# Altium PCB IoTracking_PCB.PcbDoc
Units mil, origin at the board's own origin, x right, y up, seen from the top; angles counter-clockwise.
Board outline 3149.61 x 3149.61 mil, 2 copper layers (Top Layer, Bottom Layer); 94 components, 53 nets, 307 pads, 11 vias.
Unrouted connection lines stored in the file: 210.
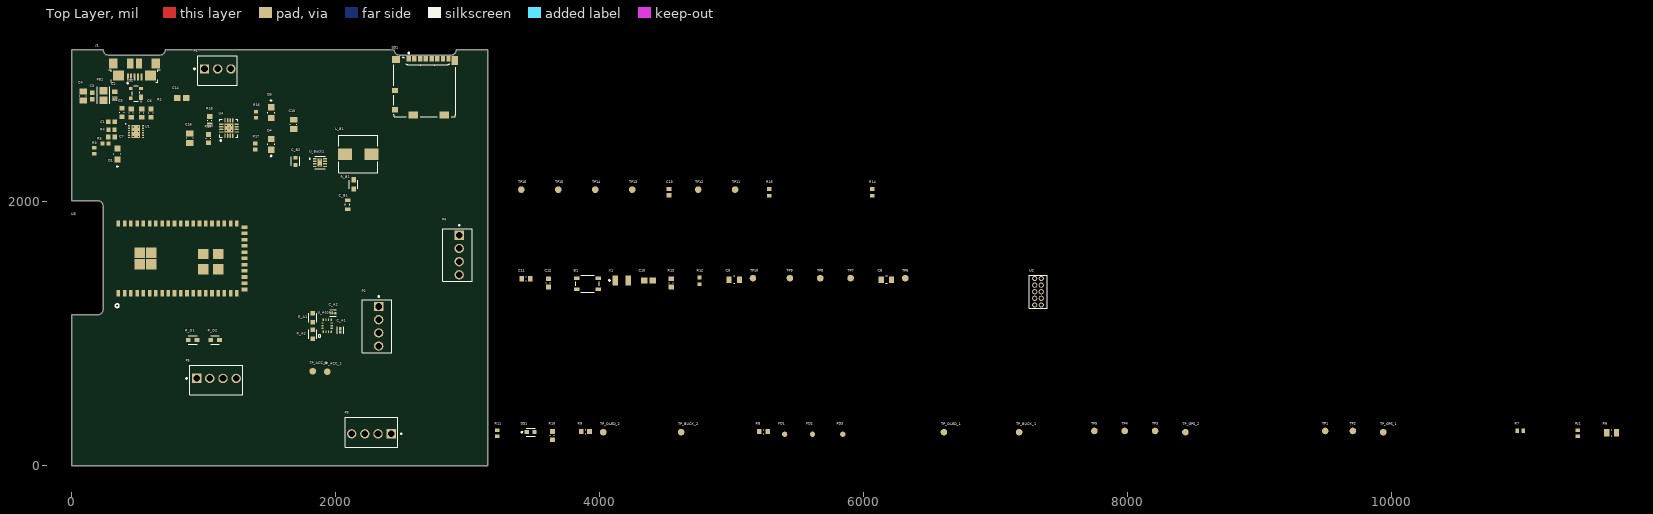
[diagram p0: Top Layer view]
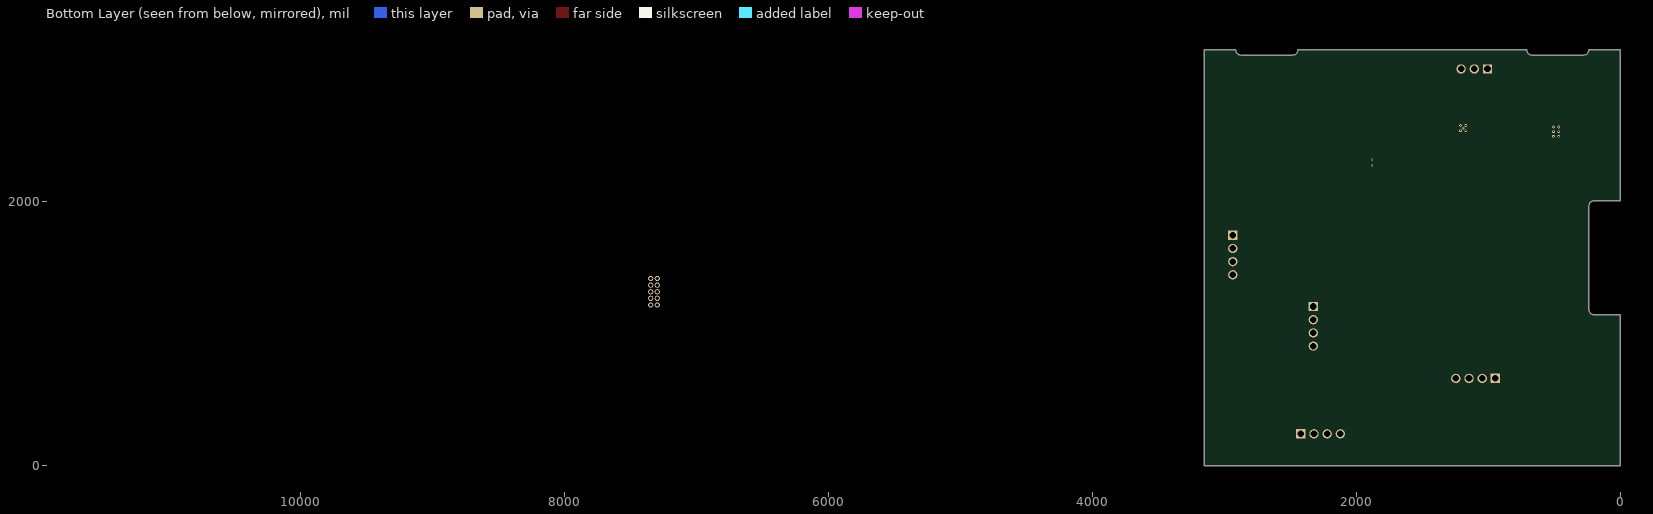
[diagram p1: Bottom Layer view, seen from below]

## Layer stack, top to bottom
Top Solder: solder mask 0.4, Solder Resist, Dk 3.5
Top Layer: signal copper 1.4
Dielectric 1: dielectric 12.6, FR-4, Dk 4.8
Bottom Layer: signal copper 1.4
Bottom Solder: solder mask 0.4, Solder Resist, Dk 3.5

## Board outline
2440.9,3149.56 708.61,3149.56 707.62,3140.8 704.71,3132.48 700.02,3125.01 693.79,3118.78 686.32,3114.09 678,3111.18 669.24,3110.19 275.54,3110.19 266.78,3111.18 258.46,3114.09 250.99,3118.78 244.76,3125.01 240.07,3132.48 237.16,3140.8 236.17,3149.56 -0.05,3149.56 -0.05,2007.83 196.8,2007.83 205.56,2006.84 213.88,2003.93 221.35,1999.24 227.58,1993 232.27,1985.54 235.18,1977.22 236.17,1968.46 236.17,1181.06 235.18,1172.29 232.27,1163.97 227.58,1156.51 221.35,1150.27 213.88,1145.58 205.56,1142.67 196.8,1141.69 -0.05,1141.69 -0.05,-0.05 3149.56,-0.05 3149.56,3149.56 2913.34,3149.56 2912.35,3140.8 2909.44,3132.48 2904.75,3125.01 2898.51,3118.78 2891.05,3114.09 2882.73,3111.18 2873.97,3110.19 2480.27,3110.19 2471.5,3111.18 2463.18,3114.09 2455.72,3118.78 2449.48,3125.01 2444.79,3132.48 2441.88,3140.8

## Design rules (kind name [scope] priority, off if disabled: settings)
Clearance [All] p1: gap=6 ignorepadtopadclearanceinfootprint=FALSE except(10: SMDPad-THPad)
DiffPairsRouting [All] p1: maxlimit=10 minlimit=10 mostfreqgap=10 toplayer_minwidth=15 toplayer_maxwidth=15 toplayer_prefwidth=15 bottomlayer_minwidth=15 bottomlayer_maxwidth=15 bottomlayer_prefwidth=15 maxuncoupledlength=500
PolygonConnect [All] p1: connectstyle=Relief reliefconductorwidth=10 reliefentries=4 polygonreliefangle="90 Angle" airgapwidth=10
RoutingVias [All] p1: holewidth=8 width=20 viastyle="Through Hole" minholewidth=8 minwidth=20 maxholewidth=30 maxwidth=50
SilkToSolderMaskClearance [IsPad] p1: minsilkscreentomaskgap=4 clearancetoexposedcopper=TRUE
SolderMaskExpansion [All] p1: expansion=4 istentingtop=FALSE
Width [All] p1: maxlimit=1000 minlimit=6 preferedwidth=10
28 further rules are at their usual default settings.

## Classes and differential pairs
component class U_Memory: C13 R14 R15 SD1 TP11 TP12 TP13 TP14 TP15 TP16
component class U_MCU: B1 C8 C9 C10 C11 C12 R12 R13 TP6 TP7 TP8 TP9 TP10 U2 U3 X1
component class U_LiPo_Charger: C14 C15 C16 D3 D4 R16 R17 R18 R19 U4
component class U_FTDI: C1 C2 C3 C4 C5 C6 C7 D1 D2 FB1 R1 R2 R3 R4 R5 U1
component class U_BuckConverter: C_B1 C_B2 L_B1 R_B1 U_Buck1
component class U_Accelerometer: C_A1 C_A2 U_Accel1
component class MAIN: DS1 FD1 FD2 FD3 J1 P1 P2 P3 P4 P5 R6 R7 R8 R9 R10 R11 R_A1 R_A2 R_O1 R_O2 RJ1 TP1 TP2 TP3 TP4 TP5 TP_ACC_1 TP_ACC_2 TP_BUCK_1 TP_BUCK_2 TP_GPS_1 TP_GPS_2 TP_OLED_1 TP_OLED_2
differential pair USB_FTDI_DATA: +USB_FTDI_DATA_P -USB_FTDI_DATA_N
differential pair USB_DATA: +USB_DATA_P -USB_DATA_N

## Components (designator, comment, footprint, x,y, rotation, side; value= is the part's Value field where it differs from the comment)
B1 "PTS810 SJK 250 SMTR LFS" "PTS810 SJK 250 SMTR LFS" 3906.75,1376.76 r0 top
C1 "100 nF 16V" CAPC1608X95X40LL15T15 299.95,2604.95 r180 top
C2 "10 nF 16V" CAPC1608X87X35NL15T15 324.95,2804.95 r90 top
C3 "100 nF 16V" CAPC1608X95X40LL15T15 154.95,2799.95 r270 top
C4 "4.7uF 16V" CAPC0805(2012)145_N 84.95,2799.95 r270 top value=4.7uF
C5 "47pF 16V" CAPC0603(1608)100_N 379.95,2674.95 r90 top value=47pF
C6 "47pF 16V" CAPC0603(1608)100_N 599.95,2669.95 r90 top value=47pF
C7 "100 nF 16V" CAPC1608X95X40LL15T15 299.95,2489.95 r0 top
C8 "10 uF 16V" FP-0805-L_2_01_0_2-W_1_25-MFG 6171.75,1408.76 r0 top
C9 "0805YD106KAT2A" FP-0805-L_2_01_0_2-W_1_25-MFG 5018.75,1408.76 r0 top
C10 "1 uF 16V" CAPC1608X90X35ML15T15 4368.75,1402.76 r0 top
C11 "18pF 16V" CAPC0603(1608)100_N 3440.75,1414.76 r0 top value=18pF
C12 "18pF 16V" CAPC0603(1608)100_N 3610.75,1384.76 r90 top value=18pF
C13 "0.1 uF 16V" CAPC1608X95X40LL15T15 4524.75,2071.76 r90 top
C14 "1 uF 16V" CAPC1608X90X35ML15T15 833.42,2784.95 r0 top
C15 "4.7uF 16V" CAPC0805(2012)145_N 1679.95,2584.52 r90 top value=4.7uF
C16 "4.7uF 16V" CAPC0805(2012)145_N 894.95,2480.39 r270 top value=4.7uF
C_A1 "100nF 6.3V" FP-GRM033-0_03-IPC_A 2034.95,1024.95 r270 top
C_A2 "100nF 6.3V" FP-GRM033-0_03-IPC_A 1979.95,1154.95 r0 top
C_B1 "22 uF 6.3 V" CAPC1608X100X20ML10 2089.95,1976.49 r90 top
C_B2 "10 uF 16V" FP-C1608-MFG 1694.95,2304.95 r270 top value=10uF
D1 "LTST-C170CKT" FP-LTST-C170CKT-MFG 344.95,2359.95 r270 top
D2 "PRTR5V0U2X,215" NXP-SOT143B-4_V 484.95,2819.95 r180 top
D3 "LTST-C170CKT" FP-LTST-C170CKT-MFG 1509.95,2673.61 r90 top
D4 "LTST-C170GKT" FP-LTST-C170GKT-MFG 1509.95,2433.61 r90 top
DS1 "Green LED" FP-LTST-C191KGKT-MFG 3476.75,252.76 r0 top
FB1 "BLM21PG221SN1D" FP-BLM21-0_2-t0_85-e0_5-IPC_A 239.95,2804.95 r270 top
FD1 "40x100mm" Fiducial_FT 5400.75,236.76 r0 top
FD2 "40x100mm" Fiducial_FT 5611.75,236.76 r0 top
FD3 "40x100mm" Fiducial_FT 5841.75,236.76 r0 top
J1 "ZX62R-B-5P" HIRO-ZX62R-B-5P_V 474.95,2994.95 r180 top
L_B1 "1 uH" WE-HCI-7040 2169.56,2359.95 r0 top
P1 "640456-3" TECO-640456-3 1104.95,3004.95 r180 top
P2 "Accelerometer Debug" TECO-640456-4 2324.95,1054.95 r90 top
P3 "GPS Header" TECO-640456-4 2269.95,239.95 r0 top
P4 "Extra Pins Header" TECO-640456-4 2934.95,1594.95 r90 top
P5 "OLED Header" TECO-640456-4 1094.95,659.95 r180 top
R1 "27R 1%" RESC0603(1608)_N 449.95,2669.95 r270 top value="27.00 Ohm"
R2 "27R 1%" RESC0603(1608)_N 529.95,2669.95 r270 top value="27.00 Ohm"
R3 "1K 1%" RESC1609X50X30LL10T20 169.95,2384.95 r90 top
R4 "Jumper" RESC1609X50X30LL10T20 299.95,2544.95 r0 top
R5 "1K 1%" RESC1609X50X30LL10T20 254.95,2439.95 r0 top
R6 "Jumper" RESC0805(2012)_N 11666.75,248.76 r0 top value="0.00 Ohm"
R7 "1KΩ 1%" RESC1609X50X30LL10T20 10973.75,262.76 r0 top
R8 "27R 1%" RESC0603(1608)_N 5240.75,256.76 r0 top value="27.00 Ohm"
R9 "27R 1%" RESC0603(1608)_N 3890.75,256.76 r0 top value="27.00 Ohm"
R10 "27R 1%" RESC0603(1608)_N 3640.75,226.76 r90 top value="27.00 Ohm"
R11 "1KΩ 1%" RESC1609X50X30LL10T20 3224.75,244.76 r90 top
R12 "10K 1%" RESC1609X55X30LL15T15 4755.75,1398.76 r90 top
R13 "100R 1%" RESC0603(1608)_N 4541.75,1384.76 r90 top value="100.00 Ohm"
R14 "10 K" RESC1609X55X30LL15T15 6063.75,2069.76 r90 top
R15 "10 K" RESC1609X55X30LL15T15 5284.75,2069.76 r90 top
R16 "1K 1%" RESC1609X50X30LL10T20 1394.95,2657.59 r270 top
R17 "1K 1%" RESC1609X50X30LL10T20 1389.95,2417.32 r270 top
R18 "1K13 1%" RESC0603(1608)_N 1044.95,2613.46 r90 top value="1130.00 Ohm"
R19 "1K13 1%" RESC0603(1608)_N 1034.95,2476.45 r90 top value="1130.00 Ohm"
R_A1 "4.7kΩ" FP-AT0603-MFG 1824.95,1119.95 r270 top value=4.7KΩ
R_A2 "4.7kΩ" FP-AT0603-MFG 1824.95,994.95 r90 top value=4.7KΩ
R_B1 "180 kΩ 0.1%" FP-CPF0603-MFG 2134.95,2129.95 r270 top value=180KΩ
R_O1 "4.7kΩ" FP-AT0603-MFG 914.95,949.95 r0 top value=4.7KΩ
R_O2 "4.7kΩ" FP-AT0603-MFG 1084.95,949.95 r180 top value=4.7KΩ
RJ1 "Jumper" RESC1609X50X30LL10T20 11411.75,244.76 r90 top
SD1 "104031-0811" MOLX-104031-0811_V 2674.95,2869.95 r180 top
TP1 "0.1\" Pad" PCBComponent 9496.75,261.76 r90 top
TP2 "0.1\" Pad" PCBComponent 9706.75,261.76 r90 top
TP3 "0.1\" Pad" PCBComponent 8207.75,261.76 r90 top
TP4 "0.1\" Pad" PCBComponent 7977.75,261.76 r90 top
TP5 "0.1\" Pad" PCBComponent 7747.75,261.76 r90 top
TP6 "0.1\" Pad" PCBComponent 6314.75,1419.76 r90 top
TP7 "0.1\" Pad" PCBComponent 5900.75,1419.76 r90 top
TP8 "0.1\" Pad" PCBComponent 5670.75,1419.76 r90 top
TP9 "0.1\" Pad" PCBComponent 5440.75,1419.76 r90 top
TP10 "0.1\" Pad" PCBComponent 5160.75,1419.76 r90 top
TP11 "0.1\" Pad" PCBComponent 5025.75,2090.76 r90 top
TP12 "0.1\" Pad" PCBComponent 4745.75,2090.76 r90 top
TP13 "0.1\" Pad" PCBComponent 4245.75,2090.76 r90 top
TP14 "0.1\" Pad" PCBComponent 3965.75,2090.76 r90 top
TP15 "0.1\" Pad" PCBComponent 3685.75,2090.76 r90 top
TP16 "0.1\" Pad" PCBComponent 3405.75,2090.76 r90 top
TP_ACC_1 "0.1\" Pad" PCBComponent 1934.95,709.95 r90 top
TP_ACC_2 "0.1\" Pad" PCBComponent 1824.95,714.95 r90 top
TP_BUCK_1 "0.1\" Pad" PCBComponent 7177.75,252.76 r90 top
TP_BUCK_2 "0.1\" Pad" PCBComponent 4616.75,252.76 r90 top
TP_GPS_1 "0.1\" Pad" PCBComponent 9936.75,252.76 r90 top
TP_GPS_2 "0.1\" Pad" PCBComponent 8437.75,252.76 r90 top
TP_OLED_1 "0.1\" Pad" PCBComponent 6607.75,252.76 r90 top
TP_OLED_2 "0.1\" Pad" PCBComponent 4026.75,252.76 r90 top
U1 "FT234XD-R" DFN-12_V 484.95,2529.95 r0 top
U2 "20021111-00010T4LF" 20021111-00010T4LF 7295.75,1316.76 r90 top
U3 "SAMW25H18-MR510PB" SAMW25H18-MR510PB 829.95,1569.95 r180 top
U4 "BQ24075RGTRG4" RGT16-1700X1700TP 1189.79,2556.88 r90 top
U_Accel1 "6 DoF Accelerometer" LSM6DSO 1934.95,1059.95 r90 top
U_Buck1 "TPS62082DSGR" SON50P200X200X80-9N 1878.73,2295.43 r0 top
X1 "ABS07-32.768KHz-T" ABRA-ABS07-2_V 4165.75,1402.76 r0 top

## Footprints (in the part's own frame and the unit in brackets; to place one, negate y for a bottom-side part, rotate by r counter-clockwise, add the part's x,y. Pads: shape width x height; smd on the part's side, far side on the other; paste and mask are expansions set on the pad)
20021111-00010T4LF [mil] "CONN HEADER 10POS UNSHD VERT T/H"
  round 39.6 hole 25.6: 1(-100,-50) 2(-100,0) 3(-50,-50) 4(-50,0) 5(0,-50) 6(0,0) 7(50,-50) 8(50,0) 9(100,-50) 10(100,0)
  silkscreen extent -125,-95 125,40, body extent -125,-92 125,42, height 217
ABRA-ABS07-2_V [mm] "Hand Drawn, 2-Leads, Body 3.2x1.5mm, Pitch 2.5mm"
  rect 1.1x1.9 smd: 1(-1.25,0) 2(1.25,0)
  silkscreen extent -2.47,-0.12 -2.22,0.12, body extent -1.6,-0.75 1.6,0.75, height 0.9
CAPC0603(1608)100_N [mm] "Chip Capacitor, Body 1.6x0.8mm, Height 1.0mm, IPC Medium Density"
  rect 0.9x1 smd: 1(-0.8,0) 2(0.8,0)
  silkscreen extent -0.05,-0.4 0.05,0.4, body extent -0.87,-0.48 0.88,0.47, height 1
CAPC0805(2012)145_N [mm] "Chip Capacitor, Body 2.0x1.2mm, Height 1.45mm, IPC Medium Density"
  rect 1.15x1.45 smd: 1(-0.9,0) 2(0.9,0)
  silkscreen extent -0.05,-0.62 0.05,0.63, body extent -1.1,-0.72 1.1,0.73, height 1.45
CAPC1608X87X35NL15T15 [mm] "Chip Capacitor, 2-Leads, Body 1.60x0.80mm, IPC Medium Density"
  rect 0.9x1 smd: 1(-0.675,0) 2(0.675,0)
  body extent -0.87,-0.48 0.87,0.47, height 0.87
CAPC1608X90X35ML15T15 [mm] "Chip Capacitor, 2-Leads, Body 1.60x0.81mm, IPC Low Density"
  rect 1.25x1.1 smd: 1(-0.85,0) 2(0.85,0)
  body extent -0.88,-0.48 0.87,0.48, height 0.9
CAPC1608X95X40LL15T15 [mm] "Chip Capacitor, 2-Leads, Body 1.60x0.80mm, IPC High Density"
  rect 0.85x0.9 smd: 1(-0.6,0) 2(0.6,0)
  body extent -0.87,-0.48 0.88,0.48, height 0.95
CAPC1608X100X20ML10 [mm] "Chip Capacitor, 2-Leads, Body 1.70x0.90mm, IPC Low Density"
  rect 0.65x1.05 smd: 1(-0.85,0) 2(0.85,0)
  silkscreen extent -0.15,-0.43 0.15,0.43, body extent -0.85,-0.45 0.85,0.45, height 1
DFN-12_V [mm] "SON, 12-Leads, Body 3x3mm, Pitch 0.45mm, Thermal Pad 2.5x1.6mm"
  rect 0.4x0.25 smd: 1(-1.35,1.125) 2(-1.35,0.675) 3(-1.35,0.225) 4(-1.35,-0.225) 5(-1.35,-0.675) 6(-1.35,-1.125) 7(1.35,-1.125) 8(1.35,-0.675) 9(1.35,-0.225) 10(1.35,0.225) 11(1.35,0.675) 12(1.35,1.125)
  rect 1.6x2.5 smd mask+0.102: 13(0,0)
  silkscreen extent -2,1.45 -1.9,1.55, body extent -1.5,-1.5 1.5,1.5, height 0.9
Fiducial_FT [mil]
  round 40 smd paste-30 mask+30: ""(0,0)
FP-0805-L_2_01_0_2-W_1_25-MFG [mm]
  rect 1x1.25 smd paste+0 mask+0: 1(-1,0) 2(1,0)
  silkscreen extent -0.13,-0.72 0.13,0.72, body extent -1.6,-0.82 1.6,0.82, height 0.25
FP-AT0603-MFG [mm]
  rect 0.9x0.8 smd paste+0 mask+0: 1(-0.85,0) 2(0.85,0)
  silkscreen extent -0.85,-0.8 0.85,0.8, body extent -1.4,-0.55 1.4,0.55, height 0.25
FP-BLM21-0_2-t0_85-e0_5-IPC_A [mil]
  rect 57.28x61.27 smd paste+0 mask+0: 1(-36.44,0) 2(36.44,0)
  silkscreen extent -65,-46 65,46, body extent -85,-50 85,50, height 10
FP-C1608-MFG [mm]
  rect 0.7x0.7 smd paste+0 mask+0: 1(-0.7,0) 2(0.7,0)
  silkscreen extent -0.86,-0.83 0.85,0.85, body extent -1.15,-0.55 1.15,0.55, height 0.25
FP-CPF0603-MFG [mm]
  rect 1x0.9 smd paste+0 mask+0: 1(-0.9,0) 2(0.9,0)
  silkscreen extent -0.82,-0.82 0.82,0.82, body extent -1.5,-0.55 1.5,0.55, height 0.25
FP-GRM033-0_03-IPC_A [mil]
  rect 21.82x18.22 smd paste+0 mask+0: 1(-13.95,0) 2(13.95,0)
  silkscreen extent -25,-25 25,25, body extent -33,-17 33,17, height 10
FP-LTST-C170CKT-MFG [mm]
  rect 1.2x1.2 smd paste+0 mask+0: 1(-1.05,0) 2(1.05,0)
  silkscreen extent -0.08,-0.67 2.63,0.67, body extent -1.75,-0.77 1.75,0.77, height 0.25
FP-LTST-C170GKT-MFG [mm]
  rect 1.2x1.2 smd paste+0 mask+0: 1(-1.05,0) 2(1.05,0)
  silkscreen extent -2.35,-0.67 0.08,0.67, body extent -1.75,-0.77 1.75,0.77, height 0.25
FP-LTST-C191KGKT-MFG [mm]
  rect 0.8x0.8 smd paste+0 mask+0: 1(-0.75,0) 2(0.75,0)
  silkscreen extent -1.82,-0.77 0.85,0.77, body extent -1.25,-0.55 1.25,0.55, height 0.25
HIRO-ZX62R-B-5P_V [mm] "USB Micro-B R/A Connector"
  rect 0.4x1.35 smd: 1(1.3,1.338) 2(0.65,1.338) 3(0,1.338) 4(-0.65,1.338) 5(-1.3,1.338)
  rect 2.1x2 smd: 6(-3.1,1.012) 11(3.1,1.012)
  rect 1.6x1.9 smd: 7(-4.1,-1.338) 10(4.1,-1.338)
  rect 1.2x1.9 smd: 8(-0.85,-1.338) 9(0.85,-1.338)
  silkscreen extent -4.95,-0.13 4.95,2.58, body extent -4.4,-3.95 4.4,1.78, height 2.71
LSM6DSO [mm] "Handmade footprint of LSM6DSO32TR"
  rect 0.475x0.25 smd: 1(-1.162,0.75) 2(-1.162,0.25) 3(-1.162,-0.25) 4(-1.162,-0.75) 8(1.162,-0.75) 9(1.162,-0.25) 10(1.162,0.25) 11(1.162,0.75)
  rect 0.25x0.475 smd: 5(-0.5,-0.913) 6(0,-0.913) 7(0.5,-0.913) 12(0.5,0.913) 13(0,0.913) 14(-0.5,0.913)
  silkscreen extent -2.25,1.25 -1.75,1.75, body extent -1.5,-1.25 1.5,1.25, height 1
MOLX-104031-0811_V [mm] "Micro SD, 8-Leads, Body 11.95x11.4mm, Pitch 1.1mm"
  rect 0.85x1.1 smd: 1(3.113,-5.412) 2(2.013,-5.412) 3(0.913,-5.412) 4(-0.188,-5.412) 5(-1.288,-5.412) 6(-2.387,-5.412) 7(-3.487,-5.412)
  rect 0.75x1.1 smd: 8(-4.537,-5.412)
  rect 1.2x1 smd: 9(5.748,0.738) 10(5.748,4.438)
  rect 1.55x1.35 smd: 11(5.573,-5.287)
  rect 1.17x1.8 smd: 12(-5.747,-5.062)
  rect 1.9x1.35 smd: 13(-3.722,5.413) 14(2.248,5.413)
  silkscreen extent -5.97,-6.64 5.98,5.74, body extent -5.97,-5.66 5.98,5.74, height 1.45
NXP-SOT143B-4_V [mm] "SOT143, 4-Leads, Body 3x1.4mm"
  rect 0.7x1 smd: 1(-1,0.75)
  rect 0.7x0.6 smd: 2(-1,-0.95) 3(1,-0.95) 4(1,0.95)
  silkscreen extent -1.05,-1.5 0.7,1.6, body extent -0.7,-1.5 0.7,1.5, height 1.1
PCBComponent [mil]
  round 50 smd mask+0: 1(0,0)
  body extent -25,-25 25,25, height 0
"PTS810 SJK 250 SMTR LFS" [mm] "SWITCH TACTILE SPST-NO 0.05A 16V"
  rect 1.05x0.65 smd: 1(-2.075,1.075) 2(2.075,1.075) 3(-2.075,-1.075) 4(2.075,-1.075)
  silkscreen extent -2.29,-1.65 2.29,1.65, body extent -2.3,-1.6 2.3,1.6, height 2.5
RESC0603(1608)_N [mm] "Chip Resistor, Body 1.6x0.8mm, IPC Medium Density"
  rect 0.9x1 smd: 1(-0.8,0) 2(0.8,0)
  silkscreen extent -0.05,-0.4 0.05,0.4, body extent -0.85,-0.47 0.85,0.47, height 0.6
RESC0805(2012)_N [mm] "Chip Resistor, Body 2.0x1.3mm, IPC Medium Density"
  rect 1.05x1.4 smd: 1(-0.95,0) 2(0.95,0)
  silkscreen extent -0.05,-0.6 0.05,0.6, body extent -1.1,-0.67 1.1,0.68, height 0.7
RESC1609X50X30LL10T20 [mm] "Chip Resistor, 2-Leads, Body 1.55x0.85mm, IPC High Density"
  rect 0.7x0.85 smd: 1(-0.575,0) 2(0.575,0)
  body extent -0.82,-0.48 0.82,0.48, height 0.5
RESC1609X55X30LL15T15 [mm] "Chip Resistor, 2-Leads, Body 1.75x0.95mm, IPC High Density"
  rect 0.75x0.85 smd: 1(-0.65,0) 2(0.65,0)
  body extent -0.87,-0.48 0.87,0.48, height 0.55
RGT16-1700X1700TP [mm] "QFN, 16-Leads, Body 3x3mm, Pitch 0.5mm, Thermal Pad 1.7x1.7mm, TI Recommended"
  oval 0.85x0.28 smd paste-0.025 mask+0.07: 1(-1.475,0.75) 2(-1.475,0.25) 3(-1.475,-0.25) 4(-1.475,-0.75) 9(1.475,-0.75) 10(1.475,-0.25) 11(1.475,0.25) 12(1.475,0.75)
  oval 0.28x0.85 smd paste-0.025 mask+0.07: 5(-0.75,-1.475) 6(-0.25,-1.475) 7(0.25,-1.475) 8(0.75,-1.475) 13(0.75,1.475) 14(0.25,1.475) 15(-0.25,1.475) 16(-0.75,1.475)
  rect 1.7x1.7 smd paste-0.85 mask+0.07: 17(0,0)
  silkscreen extent -2.5,-1.73 1.73,1.73, body extent -1.57,-1.57 1.58,1.58, height 1
SAMW25H18-MR510PB [mm] "RF TXRX MODULE WIFI TRACE ANT"
  rect 2x2 smd: 0(-7.065,-0.839) 0(-7.065,2.085) 0(-4.21,-0.839) 0(-4.21,2.085)
  rect 2x2 smd mask+0.12: 0(5.828,-1.045) 0(5.828,1.137) 0(8.046,-1.045) 0(8.046,1.137)
  rect 0.7x1.2 smd: 1(12.121,6.7) 2(10.921,6.7) 3(9.721,6.7) 4(8.521,6.7) 5(7.321,6.7) 6(6.121,6.7) 7(4.921,6.7) 8(3.721,6.7) 9(2.521,6.7) 10(1.321,6.7) 11(0.121,6.7) 12(-1.079,6.7) 13(-2.279,6.7) 14(-3.479,6.7) 15(-4.679,6.7) 16(-5.879,6.7) 17(-7.079,6.7) 18(-8.279,6.7) 19(-9.479,6.7) 20(-10.679,6.7) 32(-10.679,-6.7) 33(-9.479,-6.7) 34(-8.279,-6.7) 35(-7.079,-6.7) 36(-5.879,-6.7) 37(-4.679,-6.7) 38(-3.479,-6.7) 39(-2.279,-6.7) 40(-1.079,-6.7) 41(0.121,-6.7) 42(1.321,-6.7) 43(2.521,-6.7) 44(3.721,-6.7) 45(4.921,-6.7) 46(6.121,-6.7) 47(7.321,-6.7) 48(8.521,-6.7) 49(9.721,-6.7) 50(10.921,-6.7) 51(12.121,-6.7)
  rect 1.2x0.7 smd: 21(-12.12,6.004) 22(-12.12,4.804) 23(-12.12,3.604) 24(-12.12,2.404) 25(-12.12,1.204) 26(-12.12,0.004) 27(-12.12,-1.196) 28(-12.12,-2.396) 29(-12.12,-3.596) 30(-12.12,-4.796) 31(-12.12,-5.996)
  silkscreen extent 12.02,8.76 12.74,9.48, body extent -12.89,-7.45 20.98,7.46, height 3.37
SON50P200X200X80-9N [mm]
  rrect25% 0.74x0.28 smd: 1(-0.985,0.75) 2(-0.985,0.25) 3(-0.985,-0.25) 4(-0.985,-0.75) 5(0.985,-0.75) 6(0.985,-0.25) 7(0.985,0.25) 8(0.985,0.75)
  rect 0.9x1.6 smd paste-2: 9(0,0)
  round 0.4 hole 0.2 mask+0: 9_1(0,0.55) 9_2(0,-0.55)
  silkscreen extent -2.02,-1.21 1,1.21, body extent -1,-1 1,1, height 0.8
TECO-640456-3 [mm] "Through Hole, 3-Leads, Body 7.62x5.72mm, Pitch 2.54mm"
  rect 1.8x1.8 hole 1.27 paste+0: 1(2.54,0)
  round 1.8 hole 1.27 paste+0: 2(0,0) 3(-2.54,0)
  silkscreen extent -3.81,-2.54 4.59,3.18, body extent -3.81,-2.54 3.81,3.18, height 10.03
TECO-640456-4 [mm] "Through Hole, 4-Leads, Body 10.16x5.72mm, Pitch 2.54mm"
  rect 1.8x1.8 hole 1.27 paste+0: 1(3.81,0)
  round 1.8 hole 1.27 paste+0: 2(1.27,0) 3(-1.27,0) 4(-3.81,0)
  silkscreen extent -5.08,-2.54 5.86,3.18, body extent -5.08,-2.54 5.08,3.18, height 10.03
WE-HCI-7040 [mm] "SMD Inductor, 2-Leads, Body 7.0 x 6.9 mm"
  rect 2.7x2.2 smd: 1(-2.55,0) 2(2.55,0)
  silkscreen extent -3.75,-3.6 3.75,3.6, body extent -3.5,-3.45 3.5,3.45, height 4

## Part data
B1: "SWITCH TACTILE SPST-NO 0.05A 16V Tactile Switch SPST-NO Top Actuated Surface Mount", Color=White, Current Rating="50 mA", Manufacturer="ITT /  C&K Components", Manufacturer Part Number=PTS810SJK250SMTRLFS, Operating Force="2.6 N", Operating Temperature Range="- 40 C to + 85 C", Supplier Part Number 1=CKN10503CT-ND, Voltage Rating DC="16 VDC", Actuator=Oval, Brand="C&K Components", ComponentLink1Description=https://datasheet.ciiva.com/18514/pts810-4mar13-18514061.pdf, ComponentLink1URL=https://datasheet.ciiva.com/18514/pts810-4mar13-18514061.pdf, ComponentLink2Description=https://datasheet.ciiva.com/18514/pts810-4mar13-18514062.pdf, ComponentLink2URL=https://datasheet.ciiva.com/18514/pts810-4mar13-18514062.pdf, ComponentLink3Description=https://datasheet.ciiva.com/18514/pts810-4mar13-18514063.pdf, ComponentLink3URL=https://datasheet.ciiva.com/18514/pts810-4mar13-18514063.pdf, Contact Form=SPST, Contact Plating=Silver, Factory Pack Quantity=2900, Mounting Direction=Straight, Mounting Style=SMD/SMT, Packaging=Reel, Part # Aliases=Y97LT25B5DBFP, Product Category="Tactile Switches", RoHS=Details, Series=PTS810, Stem Height="2.5 mm", Supplier 1=Digi-Key, Switch Function="OFF - (ON)", Termination Style="J Form Lead", Travel="0.15 mm"
C1 C3 C7 C13: library part CMP-1035-02584-2, "VJ0603Y104KXJCW1BC", Manufacturer=Vitramon, Part Number=VJ0603Y104KXJCW1BC
C2: library part CMP-1035-02311-2, "C0603C103K4RACTU", Manufacturer=Kemet, Part Number=C0603C103K4RACTU
C4 C15 C16: library part CMP-1036-04893-1, "CAP 4.7uF 16V -20% to +80% 0805 (2012 Metric) Thickness 1.45mm SMD", Case-EIA=0805, Case-Metric=2012, Rated Voltage="16 V", Tolerance="-20% to +80%", Max Thickness="1.45 mm", Technology=SMT
C5 C6: library part CMP-1035-01048-1, "CAP 47pF 16V ±0.5pF 0603 (1608 Metric) Thickness 1mm SMD", Case-EIA=0603, Case-Metric=1608, Rated Voltage="16 V", Tolerance=?±0.5pF, Max Thickness="1 mm", Technology=SMT
C8 C9: library part CMP-1036-04927-3, "General Purpose Ceramic Capacitor, 0805, 10uF, 10%, X5R, 15%, 16V", Capacitance=10uF, Case Code (Imperial)=0805, Case Code (Metric)=2012, Dielectric=X5R, Dielectric Material=Ceramic, Max Operating Temperature=85°C, Min Operating Temperature=-55°C, Package Quantity=1, Tolerance=10%, Voltage=16V, Case/Package=0805, Construction=Flat, Contact Plating=Tin, Depth=1.25mm, Height=1.4mm, Lead Free="Lead Free", Length=2.01mm, Mount="Surface Mount", Number of Pins=2, Packaging="Tape and Reel", Radiation Hardening=No, REACH SVHC="No SVHC", RoHS Compliant=Yes, Series=-, Termination=SMD/SMT, Thickness=0.055inch, Voltage Rating=16V, Voltage Rating (DC)=16V, Width=0.049inch
C10 C14: library part CMP-1035-02736-2, "0603YC105JAT2A", Manufacturer="AVX Interconnect / Elco", Part Number=0603YC105JAT2A
C11 C12: library part CMP-1035-00738-1, "CAP 18pF 16V ±5% 0603 (1608 Metric) Thickness 1mm SMD", Case-EIA=0603, Case-Metric=1608, Rated Voltage="16 V", Tolerance=?±5%, Max Thickness="1 mm", Technology=SMT
C_A1 C_A2: library part CMP-06035-061037-1, "Chip Multilayer Ceramic Capacitors for General Purpose, 0201, 0.10uF, X6S, 22%, 20%, 6.3V", Capacitance=100nF, Case Code (Imperial)=0201, Case Code (Metric)=0603, Dielectric=X6S, Max Operating Temperature=105°C, Min Operating Temperature=-55°C, Package Quantity=15000, Tolerance=20%, Voltage Rating=6.3V, Case/Package=0201, Height=0.3mm, Length=0.024inch, Mount="Surface Mount", Packaging="Tape and Reel", Termination=SMD/SMT, Thickness=0.013inch, Voltage Rating (DC)=6.3V, Weight=1.2E-05oz, Width=0.012inch
C_B1: library part CMP-2000-05440-1, "Chip Capacitor, 22 uF, +/- 20%, 6.3 V, -55 to 85 degC, 1608 (0603 Metric), RoHS, Tape and Reel", Capacitance=22μF, Manufacturer=TDK, Operating Temperature=-55degC~85degC, Package / Case=0603(1608Metric), Package Description="2-Pin Surface Mount Device, Body 1.6 x 0.8 mm", Package Reference=603, PCN Part Number=MLCCPartNumberChange30/Nov/2012, Ratings=-, Standard Package=1, Temperature Coefficient=X5R, Tolerance=±20%, Voltage - Rated=6.3V, Applications=GeneralPurpose, Category=Capacitors, Datasheet URL=http://www.farnell.com/datasheets/1913358.pdf, Datasheet Version=Mar-15, Design Resources=20WNon-IsolatedBuckLEDDriverUsingPLLNK460KG, Family=CeramicCapacitors, Features=-, Height - Seated (Max)=-, Kits=445-9003-KIT-ND-KITCAPCERHICAPMLCCSMD, Lead Spacing=-, Lead Style=-, Manufacturer URL=http://www.tdk.com/, Mounting Type=SurfaceMount,MLCC, Online Catalog=CSeries,GeneralPurpose, Other Names=445-8028-1, Packaging=CutTape(CT), Product Training Modules=CSeriesGeneralApplicationsSEAT,CCV,andTVCLDesignToolsGuidetoReplacinganElectrolyticCapacitorwithanMLCC, RoHS Information=RoHSCertificate-MLCC, Series=C, Size / Dimension="0.063\"Lx0.031\"W(1.60mmx0.80mm)", Thickness (Max)="0.039\"(1.00mm)"
C_B2: library part CMP-08246-000019-1, "CAP CER 10UF 16V X5R 0603", Capacitance=10uF, Manufacturer="TDK Corporation", Manufacturer Part Number=C1608X5R1C106M080AB, Package=C1608, Temperature="-55°C to +85°C", Temperature Characteristic=X5R, Temperature Coefficient=15%, Temperature Range High=+85°C, Temperature Range Low=-55°C, Tolerance=20%, Voltage Rating=16V, Automotive=No, Category=Cap, ComponentLink2Description=Datasheet, ComponentLink2URL=https://upverter.com/datasheet/6fbac97fd59b4a24a005814037d2a36a27db40e9.pdf, Device Class L1="Passive Components", Device Class L2=Capacitors, Device Class L3="Ceramic Capacitors", Digikey Description="CAP CER 10UF 16V X5R 0603", Height=0.9mm, Ipc Land Pattern Name=CAPC16080X80, Lead Free=Yes, Material=Ceramic, Mouser Description="Multilayer Ceramic Capacitors MLCC - SMD/SMT 0603 10uF 16volts X5R +/-20% GP", Octopart=https://octopart.com/c1608x5r1c106m080ab-tdk-26013480, RoHS=TRUE
D1 D3: library part CMP-1674-00001-6, "LED RED CLEAR SMD", Case Code (Imperial)=0805, Case Code (Metric)=2012, Color=Red, Forward Current=40mA, Forward Voltage=1.8V, Lens Color=Colorless, Max Operating Temperature=85°C, Max Power Dissipation=100mW, Min Operating Temperature=-55°C, Package Quantity=1, Reverse Voltage=5V, Test Current=10mA, Case/Package=0805, Depth=1.25mm, Dominant Wavelength=638nm, Height=1.1mm, Illumination Color=Red, Lead Free="Lead Free", Length=2mm, Lens Style=Diffused, Lens Transparency=Clear, Luminous Intensity=10mcd, Mount="Surface Mount", Number of Elements=1, Number of LEDs=1, Number of Pins=2, Packaging="Tape and Reel", Power Dissipation=100mW, Power Rating=100mW, Radiation Hardening=No, Viewing Angle=130°, Voltage=5V, Wavelength=660nm, Width=1.25mm
D2: library part CMP-2000-05285-1, "Ultra Low Capacitance Double Rail-to-Rail ESD Protection Diode, 5.5 V, 1 pF, -40 to 85 degC, 4-Pin SOT143B, RoHS, Tape and Reel", Capacitance Value=16pF, ESD Protection Voltage=8KV@ContactDisc, Leakage Current=0.1uA, Manufacturer="NXP Semiconductors", Operating Temp Range=-40Cto85C, Operating Temperature Classification=Industrial, Operating Temperature Max Deg. C=85C, Operating Temperature Min Deg. C=-40C, Package / Case=SOT, Reverse Breakdown Voltage=6V, Reverse Stand-off Voltage=5.5V, Configuration=Quad, Datasheet URL=https://datasheet.ciiva.com/4479/prtr5v0u2x-102853-4479461.pdf, Datasheet Version="Rev. 02, 01/2008", Direction Type=Uni-Directional, Leakage Current (Max)=0.1uA, Manufacturer URL=http://www.nxp.com/, Mounting=SurfaceMount, Mounting Style=SurfaceMount, Number of Elements=1, Package Type=SOT, Packaging=TapeandReel, Pin Count=3+Tab, Polarity=Uni-Directional, Product Depth (mm)=1.4mm, Product Height (mm)=1mm, Product Length (mm)=3mm, Rad Hardened=No, Suppressor Type=DiodeArrays, Working Voltage=5.5V, Working Voltage (Max)=5.5V
D4: library part CMP-1674-00002-6, "LED GREEN CLEAR SMD", Case Code (Imperial)=0805, Case Code (Metric)=2012, Color=Green, Forward Current=30mA, Forward Voltage=2.1V, Lens Color=Colorless, Max Operating Temperature=85°C, Min Operating Temperature=-55°C, Package Quantity=1, Power Dissipation=100mW, Reverse Voltage=5V, Test Current=10mA, Case/Package=0805, Depth=1.25mm, Dominant Wavelength=569nm, Height=1.1mm, Illumination Color=Green, Lead Free="Lead Free", Length=2mm, Lens Style=Diffused, Lens Transparency=Clear, Luminous Intensity=6mcd, Mount="Surface Mount", Number of Elements=1, Number of LEDs=1, Number of Pins=2, Packaging="Tape and Reel", Power Rating=100mW, Radiation Hardening=No, Viewing Angle=130°, Voltage=5V, Wavelength=565nm, Width=1.25mm
DS1: library part CMP-2000-05198-2, "LED GREEN CLEAR SMD", Case Code (Imperial)=0603, Case Code (Metric)=1608, Color=Green, Forward Current=30mA, Forward Voltage=2V, Lens Color=Colorless, Max Operating Temperature=85°C, Max Power Dissipation=75mW, Min Operating Temperature=-55°C, Package Quantity=1, Reverse Voltage=5V, Test Current=20mA, Case/Package=0603, Depth=0.8mm, Dominant Wavelength=571nm, Height=0.55mm, Illumination Color=Green, Lead Free="Lead Free", Length=1.6mm, Lens Style=Rectangular, Lens Transparency=Clear, Luminous Intensity=35mcd, Mount="Surface Mount", Number of Elements=1, Number of LEDs=1, Number of Pins=2, Packaging="Tape and Reel", Power Dissipation=75mW, Power Rating=75mW, Radiation Hardening=No, Viewing Angle=130°, Wavelength=574nm, Width=0.8mm
FB1: library part CMP-0686-00610-3, "Chip Ferrite Bead, 0805, 220Ω @ 100MHz, 0.045Ω, 25%, 2A", Case Code (Imperial)=0805, Case Code (Metric)=2012, Current=2A, DC Resistance (DCR)=45mR, Frequency=100MHz, Max Operating Temperature=125°C, Min Operating Temperature=-55°C, Package Quantity=1, Tolerance=25%, Case/Package=0805, Contact Plating=Tin, Core Material=Ferrite, Current Rating=2A, DC Current=2A, DC Resistance-Max=45mR, Depth=1.25mm, Height=0.85mm, Impedance=220R, Lead Free="Lead Free", Length=2mm, Material=Ferrite, Max Current Rating=2A, Max DC Current=2A, Military Standard=Not, Number of Circuits=1, Number of Lines=1, Number of Pins=2, Packaging="Tape and Reel", Radiation Hardening=No, REACH SVHC="No SVHC", RoHS Compliant=Yes, Series=BLM21P, Shielding=Unshielded, Termination=SMD/SMT, Test Frequency=100MHz, Width=1.25mm
FD1 FD2 FD3: library part CMP-00174-A.4, "Fiducial 40x100mm"
J1: library part CMP-0031-00001-1, "Connector; USBMicro-B,Reverse type, SMT; 5 Position; Right Angle", Operating Temperature="-30 to 85 degC", ComponentLink1Description="Manufacturer URL", ComponentLink1URL=http://www.hirose.com/鈥巪ISIMPORTED=TRUE, ComponentLink2Description=Datasheet, ComponentLink2URL=http://www.hirose.co.jp/cataloge_hp/e24200011.pdf, DatasheetVersion=08/2010, Mounting Technology="Surface Mount", PackageDescription="5-Pin USB Micro-B R/A Connector", PackageReference=ZX62R-B-5P, PartNumber=ZX62R-B-5P
L_B1: library part CMP-0226-00067-1, "744311100 SMD Flat Wire High Current Inductor WE-HCI, L=1.00 μH", Inductance="1.00 ?μH", ComponentLink1Description="Manufacturer Link", ComponentLink1URL=http://www.we-online.com, ComponentLink2Description=Datasheet, ComponentLink2URL=http://www.we-online.de/katalog/media/pdf/744311100.pdf, DatasheetVersion="ver 1, Feb-2008", PackageDescription="SMD Inductor, 2-Leads, Body 7.0 x 6.9 mm", PackageReference=WE-HCI-7040, PackageVersion=2008
P1: library part CMP-2000-05418-1, "Male Header, Pitch 2.54 mm, 1 x 3 Position, Height 10.03 mm, Tail Length 3.56 mm, -55 to 105 degC", Color=White, Current, Rating="5 /  / A", Flammability Rating=UL94V-0, Manufacturer="TE Connectivity", Temperature, Operating="-55to+105 /  / degC", Voltage, Rating="250 /  / V", Agency Approvals=CSA,UL, Angle=Straight, Brand/Series=MTA-100Series, Color, Housing=White, Connector Type=MTA-100, Contact Centerline Spacing="0.100 /  / in.", Contact Mating Area Plating=Tin, Contact Plating=Tin, Contact Shape=Square, Contact Termination Area Plating=Tin, Datasheet URL=https://datasheet.ciiva.com/16456/eng-ds-82056-mta-0608-16456886.pdf, Datasheet Version=Jun-08, Length, Overall="0.3 /  / \"", Length, Pin="0.14 /  / \"", Length, Terminal Post="0.14 /  / in.", Manufacturer URL=http://www.te.com/, Material, Contact=CopperAlloy, Material, Housing=Polyester, Mount Angle=Vertical, Mounting Hole Size="0.04 /  / \"", Mounting Type=PCMount, Number of Contacts=3, Number of Positions=3, Number of Rows=1, Pin Spacing="0.1 /  / \"", Primary Type=InterconnectSystem, Size, Post="0.025 /  / in.", Special Features=Pinstrip, Standards=RoHSCompliant,ELVCompliant,UL94V-0, Termination=Solder, Type=PCBPlug
P2 P3 P4 P5: library part CMP-2000-05419-1, "Male Header, Pitch 2.54 mm, 1 x 4 Position, Height 10.03 mm, Tail Length 3.56 mm, RoHS, Bulk", Color=White, Current, Rating="5 /  / A", Flammability Rating=UL94V-0, Manufacturer="TE Connectivity", Temperature, Operating="-55to+105 /  / degC", Voltage, Rating="250 /  / V", Agency Approvals=CSA,UL, Angle=Straight, Brand/Series=MTA-100Series, Color, Housing=White, Connector Type=MTA-100, Contact Centerline Spacing="0.100 /  / in.", Contact Mating Area Plating=Tin, Contact Plating=Tin, Contact Shape=Square, Contact Termination Area Plating=Tin, Datasheet URL=https://datasheet.ciiva.com/16286/eng-ds-82056-mta-0608-16286228.pdf, Datasheet Version=Dec-14, Length, Overall="0.4 /  / \"", Length, Pin="0.14 /  / \"", Length, Terminal Post="0.14 /  / in.", Manufacturer URL=http://www.te.com/, Material, Contact=CopperAlloy, Material, Housing=Polyester, Mount Angle=Vertical, Mounting Hole Size="0.04 /  / \"", Mounting Type=PCMount, Number of Contacts=4, Number of Positions=4, Number of Rows=1, Pin Spacing="0.1 /  / \"", Primary Type=InterconnectSystem, Size, Post="0.025 /  / in.", Special Features=Pinstrip, Standards=RoHSCompliant,ELVCompliant,UL94V-0, Termination=Solder, Type=PCBPlug
R1 R2 R8 R9 R10: library part CMP-1012-00331-1, "27R 0.1W 1% 0603 (1608 Metric)  SMD", Case-EIA=0603, Case-Metric=1608, Power="0.1 W", Tolerance="1 %", Technology=SMT
R3 R5 R16 R17: library part CMP-1012-00510-2, "CRCW06031K00FKEB", Manufacturer="Vishay Dale", Part Number=CRCW06031K00FKEB
R4: library part CMP-1012-00001-2, Manufacturer="Vishay Dale", Part Number=CRCW06030000Z0EC
R6: library part CMP-1013-00001-1, "Jumper 0805 (2012 Metric)", Case-EIA=0805, Case-Metric=2012, Power=None, Technology=SMT, Tolerance=None
R7 R11: library part CMP-1012-00510-2, "1KΩ 1%CRCW06031K00FKEB", Manufacturer="Vishay Dale", Part Number=CRCW06031K00FKEB
R12 R14 R15: library part CMP-1012-00623-3, "Chip Resistor, 10 KOhm, +/- 1%, 0.1 W, -55 to 155 degC, 0603 (1608 Metric), RoHS, Tape and Reel", Case Code (Imperial)=0603, Case Code (Metric)=1608, Manufacturer=Panasonic, Max Operating Temperature=155degC, Max Power Dissipation=100mW, Min Operating Temperature=-55degC, Package Description="2-Pin Surface Mount Device, Body 1.6 x 0.85 mm", Package Quantity=1, Package Reference=603, Resistance=10KOhm, Temperature Coefficient=100ppm\/degreesC, Tolerance=1%, Voltage Rating=75V, Case\/Package=0603, Composition=ThickFilm, Contact Plating=Tin, Datasheet URL=https://industrial.panasonic.com/cdbs/www-data/pdf/RDA0000/AOA0000C304.pdf, Datasheet Version=02/2017, Depth=0.8mm, Height=0.45mm, Lead Free=LeadFree, Length=1.6mm, Manufacturer URL=http://www.panasonic.com/, Military Standard=Not, Mount=SurfaceMount, Mounting Technology=SurfaceMount, Number of Pins=2, Number of Terminations=2, Packaging=TapeandReel, Power Rating=100mW, Radiation Hardening=No, REACH SVHC=NoSVHC, RoHSCompliant=true, Termination=SMD/SMT, Voltage Rating (DC)=75V, Width=0.031inch
R13: library part CMP-1012-00397-1, "100R 0.1W 1% 0603 (1608 Metric)  SMD", Case-EIA=0603, Case-Metric=1608, Power="0.1 W", Tolerance="1 %", Technology=SMT
R18 R19: library part CMP-1012-00515-1, "1K13 0.1W 1% 0603 (1608 Metric)  SMD", Case-EIA=0603, Case-Metric=1608, Power="0.1 W", Tolerance="1 %", Technology=SMT
R_A1 R_A2 R_O1 R_O2: library part CMP-03412-008985-1, "RES SMD 4.7K OHM 0.5% 1/10W 0603", Manufacturer=Yageo, Manufacturer Part Number=AT0603DRD074K7L, Package=AT0603, Power Rating=0.1W, Resistance=4.7KΩ, Temperature="-55°C to +155°C", Temperature Coefficient="25 ppm/°C", Temperature Range High=+155°C, Temperature Range Low=-55°C, Tolerance=0.005, Voltage Rating=75V, Automotive=Yes, Automotive Grade="Grade 0", Category=Res, ComponentLink2Description=Datasheet, ComponentLink2URL=http://www.yageo.com/documents/recent/PYu-AT_51_RoHS_L_5.pdf, Device Class L1="Passive Components", Device Class L2=Resistors, Device Class L3="Chip SMD Resistors", Digikey Description="RES SMD 4.7K OHM 0.5% 1/10W 0603", Footprint Url=http://www.yageo.com/exep/pages/download/literatures/PYu-R_Mount_9.pdf, Height=0.55mm, Ipc Land Pattern Name=RESC16080X45, Lead Free=Yes, Mouser Description="Res Thin Film 0603 4.7K Ohm 0.5% 0.1W(1/10W) ±25ppm/C Sulfur Resistant Epoxy Pad SMD Automotive T/R", Octopart=https://octopart.com/at0603drd074k7l-yageo-71378151, RoHS=TRUE, Series=AT
R_B1: library part CMP-03211-002805-1, "RES SMD 180KΩ 0.1% 1/16W 0603", Manufacturer="TE Connectivity", Manufacturer Part Number=CPF0603B180KE, Package=CPF0603, Power Rating=0.063W, Resistance=180KΩ, Temperature="-55°C to +155°C", Temperature Coefficient=25ppm/°C, Temperature Range High=+155°C, Temperature Range Low=-55°C, Tolerance=0.1%, Voltage Rating=50V, Automotive=No, Category=Res, ComponentLink2Description=Datasheet, ComponentLink2URL=https://www.te.com/commerce/DocumentDelivery/DDEController?Action=showdoc&DocId=Data+Sheet%7F1773200%7FM%7Fpdf%7FEnglish%7FENG_DS_1773200_M.pdf%7F3-1676481-2, Composition="Thin Film", Device Class L1="Passive Components", Device Class L2=Resistors, Device Class L3="Chip SMD Resistors", Height=0.55mm, Ipc Land Pattern Name=RESC15580X45, Lead Free=Yes, Octopart=https://octopart.com/cpf0603b180ke-te+connectivity-23257790, octopart_url=https://octopart.com/cpf0603b180ke-te+connectivity-23257790, Packaging="5k Reel", RoHS=TRUE, Series=CPF
RJ1: library part CMP-1012-00001-2, "0 Ohm CRCW06030000Z0EC", Manufacturer="Vishay Dale", Part Number=CRCW06030000Z0EC
SD1: library part CMP-2000-05825-1, "Micro SD Card, RA, -25 to 85 degC, 8-Pin SMD, RoHS, Tape and Reel", Current Rating=500mA, Manufacturer=Molex, Package Description="8-Pin Surface Mount Device, Body 11.95 x 11.4 mm, Pitch 1.1 mm", Voltage Rating=10VAC/DC, Brand=Molex, Card Type=microSD, Contact Material=PhosphorBronze, Contact Plating=Gold, Datasheet URL=http://www.molex.com/pdm_docs/sd/1040310811_sd.pdf, Datasheet Version="Rev. E, 04/2006", Height=1.42mm, Housing Material=LiquidCrystalPolymer(LCP), Insertion - Extraction Style=Push-Pull, Length=11.4mm, Manufacturer URL=http://www.molex.com/, Mating Cycles=10000, Mounting Technology=SurfaceMount, Mounting Type=Standard, Number of Contacts=8, Number of Rows=1Row, Orientation=RightAngle, Package Reference=104031-0811, Packaging=Reel, Pitch=1.1mm, Product=CardConnectors, Product Category=MemoryCardConnectors, RoHS=True, Series=104031, Termination Style=SMD
TP1 TP2 TP3 TP4 TP5 TP6 TP7 TP8 TP9 TP10 TP11 TP12 TP13 TP14 TP15 TP16 TP_ACC_1 TP_ACC_2 TP_BUCK_1 TP_BUCK_2 TP_GPS_1 TP_GPS_2 TP_OLED_1 TP_OLED_2: library part "0.1\" Pad-A.4"
U1: library part CMP-0248-00027-1, "FT234XD USB to BASIC UART IC, -40 to +85 degC, 12-Pin DFN, Pb-Free, Tape and Reel", Manufacturer=FTDI, ComponentLink1Description="Manufacturer URL", ComponentLink1URL=http://www.ftdichip.com/, ComponentLink2Description=Datasheet, ComponentLink2URL=http://www.ftdichip.com/Support/Documents/DataSheets/ICs/DS_FT234XD.pdf, DatasheetVersion="ver 1.1, Feb-2013", PackageDescription="12-Pin Dual Flat No-Lead, 3 x 3 mm Body, 0.45 mm Pitch, Exposed Pad", PackageReference=DFN-12, PackageVersion=Feb-13, PartNumber=FT234XD-R
U2: "CONN HEADER 10POS UNSHD VERT T/H", Current Rating="10 A", Manufacturer="Amphenol / FCI", Supplier Part Number 1=609-3712-ND, Voltage Rating="125 V", Brand=FCI, ComponentLink1Description=https://datasheet.ciiva.com/1433/1079612-1433267.pdf, ComponentLink1URL=https://datasheet.ciiva.com/1433/1079612-1433267.pdf, ComponentLink2Description=https://datasheet.ciiva.com/409/20021111-409158.pdf, ComponentLink2URL=https://datasheet.ciiva.com/409/20021111-409158.pdf, ComponentLink3Description=https://datasheet.ciiva.com/5131/20021111-5131386.pdf, ComponentLink3URL=https://datasheet.ciiva.com/5131/20021111-5131386.pdf, ComponentLink4Description=https://datasheet.ciiva.com/9465/20021111-9465402.pdf, ComponentLink4URL=https://datasheet.ciiva.com/9465/20021111-9465402.pdf, Contact Material=Nickel, Contact Plating=Gold, Factory Pack Quantity=93, Housing Material=Plastic, Manufacturer Part Number=20021111-00010T4LF, Mating Post Length="3.05 mm", Mounting Angle=Vertical, Mounting Style="Through Hole", Number of Positions=10, Number of Positions / Contacts=10, Number of Rows=2, Packaging=Tube, Pitch="1.27 mm", Product Category="Headers & Wire Housings", Product Type=Headers, RoHS=Details, Series=Minitek, Stack Height="2.5 mm", Supplier 1=Digi-Key, Termination Post Length="2.3 mm", Termination Style="Through Hole", Type=Unshrouded
U3: "RF TXRX MODULE WIFI TRACE ANT", Current - Receiving=-, Frequency=2.4GHz, Manufacturer=Atmel, Manufacturer Part Number=ATSAMW25H18-MR510PB, Operating Temperature="-40°C ~ 85°C", Package / Case=Module, Power - Output=17dBm, Supplier Part Number 1=ATSAMW25H18-MR510PB-ND, Voltage - Supply="2.7 V ~ 4.2 V", Antenna Type="Integrated, Trace", Category="RF/IF and RFID", ComponentLink1Description=http://www.atmel.com/devices/ATSAMW25.aspx, ComponentLink1URL=http://www.atmel.com/devices/ATSAMW25.aspx, ComponentLink2Description=http://www.farnell.com/datasheets/1965115.pdf, ComponentLink2URL=http://www.farnell.com/datasheets/1965115.pdf, Current - Transmitting=-, Data Rate=65Mbps, Family="RF Transceiver Modules", Memory Size="256kB Flash, 32kB SRAM", Modulation=-, Mounting Type="Surface Mount", Packaging=Tray, Pricing 1="1=19.14 (USD)", Protocol=802.11b/g/n, RF Family/Standard=WiFi, Sensitivity=-95.5dBm, Serial Interfaces="SPI, UART", Series="Xplained Pro", Stock 1=120, Supplier 1=Digikey
U4: library part CMP-0321-00237-1, "USB-Friendly Li-Ion Battery Charger and Power-Path Management IC, Vout 5.5 V, 4.3 V, -40 to 85 degC, 16-pin QFN (RGT), Green (RoHS & no Sb/Br)", Manufacturer="Texas Instruments", Over Voltage Protection=N, Code_JEDEC=MO-220, ComponentLink1Description=Datasheet, ComponentLink1URL=http://www.ti.com/general/docs/lit/getliterature.tsp?genericPartNumber=BQ24075&fileType=pdf, DatasheetVersion=SLUS810G, Eco-Plan="Green (RoHS & no Sb/Br)", Lead Acid=N, Li-Ion=N, Li-Polymer=N, Mounting Technology="Surface Mount", NiCd=N, NiMH=N, PackageDescription="16-Pin Plastic Quad Flat No-Lead, 3 x 3 mm Body, 0.5 mm Pitch, 1.7 x 1.7 mm Exposed Pad", PackageReference=RGT16-1700X1700TP, PackageVersion="revH, Oct-2011", PartNumber=BQ24075RGTRG4, SubFamily="Battery Charge Management", Vin(Min)(V)=4.3
U_Accel1: library part LSM6DSO32TR, "Accelerometer and 3D Gyroscope 3D Always-On 1.71V to 3.6V 0.55mA 14-Pin LGA T/R", Manufacturer=STMicroelectronics, Supplier Part Number 1=497-LSM6DSO32CT-ND, Category="Inertial Measurement Units (IMUs)", Manufacturer Part Number=LSM6DSO32TR, Pricing 1="1=4.97000, 10=4.46700, 25=4.22280, 100=3.65990, 500=3.12812 (USD)", RoHS=Yes, Stock 1=3420, Supplier 1=Digi-Key
U_Buck1: "1.2A High Efficient Step Down Converter in 2x2mm SON Package. 3.3 Vout (Min) 8-WSON -40 to 125", Package="WSON-8 Texas Instruments", Check_prices=https://www.snapeda.com/parts/TPS62082DSGR/Texas%20Instruments/view-part/232318/?ref=eda, Digi-Key_Part_Number=296-49331-1-ND, MF="Texas Instruments", MP=TPS62082DSGR, Purchase-URL=https://pricing.snapeda.com/search/part/TPS62082DSGR/?ref=eda, SnapEDA_Link=https://www.snapeda.com/parts/TPS62082DSGR/Texas%20Instruments/view-part/232318/?ref=snap
X1: library part CMP-0447-00001-2, "Crystal, 32.768 kHz, 12.5 pF, -40 to 85 degC, SMD Low Profile 3.2 x 1.5 x 0.9 mm, Tape and Reel", Equivalent Series Resistance (R1)="70 Kohm", Frequency="32.768 kHz", Frequency Tolerance @+25degC="+/- 20 ppm", Insulation Resistance (Min)="500 Mohm", Load Capacitance (CL)="12.5 pF", Manufacturer=Abracon, Operating Temperature="-40 to 85 degC", Q Value (Type)=30000, Shunt Capacitance (C0)="0.9 to 1.2 pF", ComponentLink1Description="Manufacturer URL", ComponentLink1URL=http://www.abracon.com/, ComponentLink2Description=Datasheet, ComponentLink2URL=http://www.abracon.com/Resonators/ABS07.pdf, ComponentLink3Description="Package Specification", ComponentLink3URL=http://www.abracon.com/Resonators/ABS07.pdf, DatasheetVersion=04.03.13, Drive Level (Type)="0.1 uW", Mounting Technology="Surface Mount", Operation Mode="Flexural Mode (Tuning Fork)", PackageDescription="2-Pin Hand Drawn, Body 3.2x1.5mm, Pitch 2.5mm", PackageReference=ABS07-2, Packing="Tape and Reel", PartNumber=ABS07-32.768KHz-T

## Via types
v1: diameter 19.68, hole 7.87, Top Layer to Bottom Layer, 6 vias
v2: diameter 19.68, hole 7.87, Top Layer to Bottom Layer, tented top, 5 vias

## Nets (pads, with @x,y where several pads share a name; then routed paths per layer and width w, separated by ;. In a path a pad name is that pad's centre, name@x,y a point inside that pad or via, vN(x,y) a via of type N, cw(c..) or ccw(c..) an arc to the next point about the centre after c; other vN are vias at no path point)
"1.8 Vout": C_B1.2 L_B1.2 R_B1.2 U_Buck1.5
3V3: C8.1 C13.2 C_A1.1 C_A2.1 P2.3 P3.4 P5.3 R11.1 R12.2 R14.2 R15.2 R_A1.1 R_A2.1 R_B1.1 R_O1.1 R_O2.1 SD1.4 TP6.1 TP11.1 TP_BUCK_1.1 U2.1 U3.7 U3.21 U_Accel1.5 U_Accel1.8 U_Accel1.12 U_Buck1.6
BQ_BAT_TS: R7.1 TP5.1 U4.1
BQ_ILIM: R18.2 U4.12
BQ_ISET: R19.2 U4.16
Buck_Vin: C_B2.1 RJ1.2 U_Buck1.1 U_Buck1.8
CBUS0: D1.1 U1.6
EP1: P4.1 U3.36
EP2: P4.2 U3.33
EP3: P4.3 U3.27
EP4: P4.4 U3.28
FLASH_MEM_SPI_SS: R14.1 SD1.2 TP16.1 U3.37
GND: B1.3 B1.4 C1.1 C2.1 C3.1 C4.1 C5.1 C6.1 C7.1 C8.2 C10.1 C11.1 C12.1 C13.1 C14.1 C15.1 C16.2 C_A1.2 C_A2.2 C_B1.1 C_B2.2 D2.1 J1.5 J1.6 J1.7 J1.8 J1.9 J1.10 J1.11 P1.1 P2.4 P3.3 P5.4 R7.2 R18.1 R19.1 SD1.6 SD1.10 SD1.11 SD1.12 TP3.1 TP7.1 TP_BUCK_2.1 U1.5 U1.13 U2.3 U2.5 U2.9 U3.0 U3.1 U3.10 U3.17 U3.20 U3.32 U3.42 U3.51 U4.4 U4.5 U4.8 U4.14 U4.15 U4.17 U_Accel1.1 U_Accel1.2 U_Accel1.3 U_Accel1.6 U_Accel1.7 U_Buck1.2 U_Buck1.3
  other v1: 465.27,2494.52 504.64,2494.52 465.27,2529.95 504.64,2529.95 465.27,2565.39 504.64,2565.39
  other v2: 1170.11,2537.2 1209.48,2537.2 1189.79,2556.88 1170.11,2576.57 1209.48,2576.57
MCU_LED: DS1.1 U3.16
MCU_RESET: C10.2 R12.1 R13.2 TP10.1 U2.10 U3.24
MCU_RX_UART_CLI: TP4.1 U1.7 U3.44
MCU_TX_UART_CLI: TP2.1 U1.10 U3.43
MEM_SPI_CLK: R10.2 SD1.5 TP15.1
MEM_SPI_MISO: R9.2 SD1.7 TP14.1
MEM_SPI_MOSI: R8.2 SD1.3 TP13.1
NetB1_1: B1.1 B1.2 R13.1
NetD1_2: D1.2 R3.1
NetD3_1: D3.1 R16.2
NetD4_1: D4.1 R17.2
NetDS1_2: DS1.2 R11.2
NetL_B1_1: L_B1.1 U_Buck1.7
NetR16_1: R16.1 U4.9
NetR17_1: R17.1 U4.7
RS: C7.2 R4.2 R5.2 U1.2
SD_CARD_DETECT: R15.1 SD1.9 TP12.1
SERCOM0_I2C_SCL: P2.1 R_A1.2 TP_ACC_1.1 U3.39 U_Accel1.13
SERCOM0_I2C_SDA: P2.2 R_A2.2 TP_ACC_2.1 U3.38 U_Accel1.14
SERCOM1_PAD2_SPI_MISO: R9.1 U3.8
SERCOM1_PAD2_SPI_MOSI: R8.1 U3.11
SERCOM1_PAD3_SPI_SCK: R10.1 U3.12
SERCOM2_UART_RX: P3.1 TP_GPS_2.1 U3.41
SERCOM2_UART_TX: P3.2 TP_GPS_1.1 U3.40
SERCOM3_I2C_SCL: P5.1 R_O1.2 TP_OLED_1.1 U3.9
SERCOM3_I2C_SDA: P5.2 R_O2.2 TP_OLED_2.1 U3.15
SWCLK: TP9.1 U2.4 U3.25
SWDIO: TP8.1 U2.2 U3.26
USB_DATA_N: C5.2 D2.3 J1.2 R1.1
USB_DATA_P: C6.2 D2.2 J1.3 R2.1
USB_FTDI_DATA_N: R1.2 U1.1
USB_FTDI_DATA_P: R2.2 U1.12
VBAT: C16.1 P1.3 U4.2 U4.3
VBUS: C2.2 D2.4 FB1.1 J1.1
VCCIO: C1.2 R4.1 U1.3 U1.9
VOUT: R6.2 RJ1.1
Vout_BQ: C15.2 D3.2 D4.2 R6.1 U4.6 U4.10 U4.11
VUSB: C3.2 C4.2 C14.2 FB1.2 R3.2 R5.1 TP1.1 U1.4 U4.13
XIN_32: C11.2 U3.29 X1.1
XOUT_32: C12.2 U3.30 X1.2
pads on no net: C9.1 C9.2 FD1. FD2. FD3. J1.4 P1.2 SD1.1 SD1.8 SD1.13 SD1.14 U1.8 U1.11 U2.6 U2.7 U2.8 U3.2 U3.3 U3.4 U3.5 U3.6 U3.13 U3.14 U3.18 U3.19 U3.22 U3.23 U3.31 U3.34 U3.35 U3.45 U3.46 U3.47 U3.48 U3.49 U3.50 U_Accel1.4 U_Accel1.9 U_Accel1.10 U_Accel1.11 U_Buck1.4 U_Buck1.9 U_Buck1.9_1 U_Buck1.9_2

## Text inside footprints (layer, text, board x,y; h text height)
J1: Mechanical 1 "Board edge" at 254.95,3099.95 h7.87 r180